# Altium PCB PCB1.PcbDoc
Units mil, origin at the board's own origin, x right, y up, seen from the top; angles counter-clockwise.
Board outline 10614.63 x 650 mil, 2 copper layers (Top Layer, Bottom Layer); 27 components, 29 nets, 217 pads, 19 vias.
Unrouted connection lines stored in the file: 21.
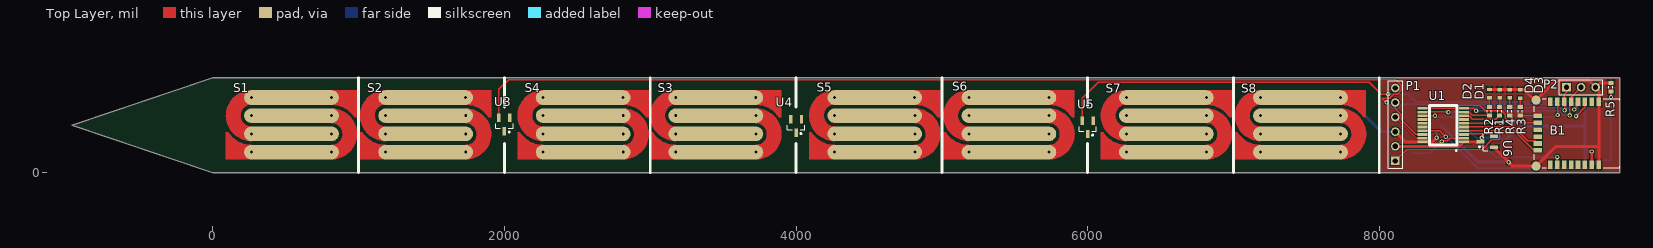
[diagram p0: Top Layer view]
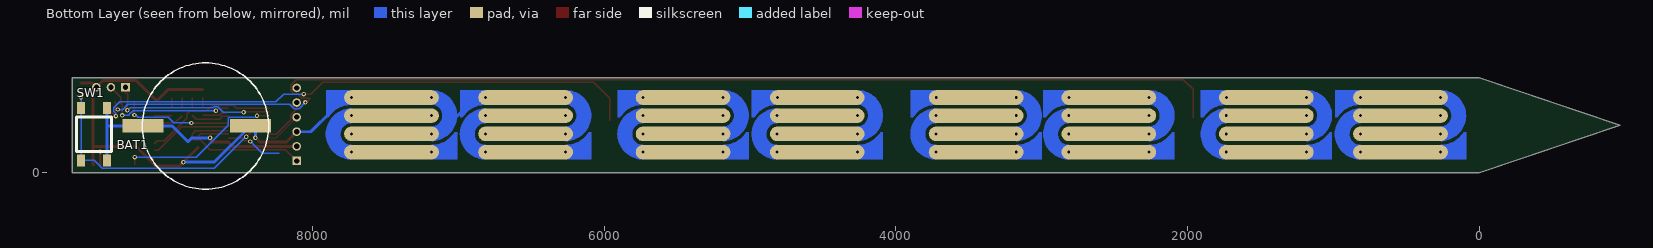
[diagram p1: Bottom Layer view, seen from below]

## Layer stack, top to bottom
Top Solder: solder mask 0.4, Solder Resist, Dk 3.5
Top Layer: signal copper 1.4
Dielectric 1: dielectric 12.6, FR-4, Dk 4.8
Bottom Layer: signal copper 1.4
Bottom Solder: solder mask 0.4, Solder Resist, Dk 3.5

## Board outline
9650,0 0,0 -964.62,325 0,650 9650,650

## Design rules (kind name [scope] priority, off if disabled: settings)
Clearance [All] p1: gap=7
HoleSize [All] p1: absolutevalues=TRUE maxlimit=100 minlimit=10 maxpercent=80.000 minpercent=20.000
MinimumSolderMaskSliver [All] p1: minsoldermaskwidth=7
PolygonConnect [All] p1: connectstyle=Relief reliefconductorwidth=10 reliefentries=4 polygonreliefangle="90 Angle" airgapwidth=10
RoomDefinition Sheet1 [InComponentClass('Sheet1')] p1 off: confinementstyle=ConfineIn formatcopy=TRUE lockcomponents=FALSE outline -7999.62,-4020 -5999.62,-4020 -5999.62,-3020 -7999.62,-3020
RoutingVias [All] p1: holewidth=10 width=25 viastyle="Through Hole" minholewidth=10 minwidth=25 maxholewidth=28 maxwidth=50
SilkToSilkClearance [All] p1 off: silktosilkclearance=10
SilkToSolderMaskClearance [IsPad] p1 off: minsilkscreentomaskgap=10 clearancetoexposedcopper=TRUE
SolderMaskExpansion [All] p1: expansion=4
Width Width_VCC [InNet('VCC')] p1: maxlimit=20 minlimit=8 preferedwidth=20
Width Width_GND [InNet('GND')] p2: maxlimit=20 minlimit=8 preferedwidth=20 minimp=50.000000 maximp=50.000000 favimp=50.000000
Width [All] p3: maxlimit=20 minlimit=8 preferedwidth=20 minimp=50.000000 maximp=50.000000 favimp=50.000000
26 further rules are at their usual default settings.

## Components (designator, comment, footprint, x,y, rotation, side; value= is the part's Value field where it differs from the comment)
B1 "RN4020" "RN4020 MODULE-24" 9290,270 r270 top
BAT1 "2032 Coin Cell" 1063TR-COINCELL 8770,320 r270 bottom
D1 "LED" 603_ 8825,540 r0 top
D2 "LED" 603_ 8756,541 r0 top
D3 "LED" 603_ 8966,539 r0 top
D4 "LED" 603_ 8895,540 r0 top
P1 "Header 6" HDR1X6 8110,80 r90 top
P2 "Serial" HDR1X3 9284,585 r0 top
R1 "Res3" J1-0603 8825,421 r90 top
R2 "Res3" J1-0603 8755,421 r90 top
R3 "Res3" J1-0603 8967,420 r90 top
R4 "Res3" J1-0603 8895,420 r90 top
R5 "Res3" J1-0603 9589,585 r270 top
S1 "MoistureSensor" MOISTURE_2 90,90 r0 top
S2 "MoistureSensor" MOISTURE_2 1010,90 r0 top
S3 "MoistureSensor" MOISTURE_2 3000.19,90 r0 top
S4 "MoistureSensor" MOISTURE_2 2090,90 r0 top
S5 "MoistureSensor" MOISTURE_2 4090,90 r0 top
S6 "MoistureSensor" MOISTURE_2 5010,90 r0 top
S7 "MoistureSensor" MOISTURE_2 6090,90 r0 top
S8 "MoistureSensor" MOISTURE_2 7010,90 r0 top
SW1 "PUSHBUTTON" PUSHBUTTON 9411,83 r0 bottom
U1 "PIC16LF1559" SSOP-20 8580,210 r180 top
U3 "MCP9700" SOT23_M 2000,330 r270 top
U4 "MCP9700" SOT23_M 4000,320 r270 top
U5 "MCP9700" SOT23_M 6000,310 r270 top
U6 "MCP9700" SOT23_M 8740,210 r180 top

## Footprints (in the part's own frame and the unit in brackets; to place one, negate y for a bottom-side part, rotate by r counter-clockwise, add the part's x,y. Pads: shape width x height; smd on the part's side, far side on the other; paste and mask are expansions set on the pad)
603_ [mm]
  rect 0.8x0.6 smd: 1(0,-0.725) 2(0,0.725)
1063TR-COINCELL [mm]
  rect 2.36x7.1 smd: 1(0,-10) 2(0,8.7)
  silkscreen extent -10.97,-10.12 11.02,11.87
HDR1X3 [mm] "Connector; Header; 3 Position"
  rect 1.5x1.5 hole 0.9: 1(0,0)
  round 1.5 hole 0.9: 2(2.54,0) 3(5.08,0)
  silkscreen extent -1.27,-1.27 6.35,1.27
HDR1X6 [mm] "Connector; Header; 6 Position"
  rect 1.5x1.5 hole 0.9: 1(0,0)
  round 1.5 hole 0.9: 2(2.54,0) 3(5.08,0) 4(7.62,0) 5(10.16,0) 6(12.7,0)
  silkscreen extent -1.27,-1.27 13.97,1.27
J1-0603 [mm] "Chip Resistor, Body 1.6x0.8mm, IPC High Density"
  rect 0.7x0.9 smd: 1(-0.75,0) 2(0.75,0)
  silkscreen extent -0.2,-0.35 0.2,0.35, body extent -0.85,-0.48 0.85,0.48, height 0.9
MOISTURE_2 [mil]
  round 30 hole 20: 0(175,175.13) 0(175.01,425.36) 0(723.64,424.77) 0(725,175) 1(175,300) 1(175,49.88) 1(725,49.64) 1(725,299.87)
  oval 650x100 smd paste-1000: 0(449.93,424.51) 0(450,175) 1(450,50) 1(450,300)
  oval 650x100 smd far side paste-1000: 0(449.93,424.51) 0(450,175) 1(450,50) 1(450,300)
  Top Layer region: 723.64,374.66 809.98,354.39 876.55,295.78 876.56,295.78 882.97,290.02 898.64,290.02 898.64,299.66 898.64,474.66 723.64,474.66
  Top Layer region: 175,125.25 87.95,149.33 24.08,213.2 0,300.25 0,300.25 24.08,387.3 87.95,451.17 175,475.25 175,475.25 175,375.25 146.05,369.98 121.49,353.76 105.27,329.21 100,300.25 100,300.25 110.54,263.1 137.85,235.79 175,225.25 175,225.25
  Top Layer region: 725,349.75 812.05,325.67 875.92,261.8 900,174.75 900,174.75 875.92,87.7 812.05,23.83 725,-0.25 725,-0.25 725,99.75 753.95,105.02 778.51,121.24 794.73,145.79 800,174.75 800,174.75 789.46,211.9 762.15,239.21 725,249.75 725,249.75
  Top Layer region: 175,100 91.86,118.66 26.27,173.04 26.27,173.04 15.67,184.64 0,184.64 0,175 0,0 175,0
  Bottom Layer region: 723.64,374.66 809.98,354.39 876.56,295.78 876.56,295.78 882.97,290.02 898.64,290.02 898.64,299.66 898.64,474.66 723.64,474.66
  Bottom Layer region: 175,125.25 87.95,149.33 24.08,213.2 0,300.25 0,300.25 24.08,387.3 87.95,451.17 175,475.25 175,475.25 175,375.25 146.05,369.98 121.49,353.76 105.27,329.21 100,300.25 100,300.25 110.54,263.1 137.85,235.79 175,225.25 175,225.25
  Bottom Layer region: 725,349.75 812.05,325.67 875.92,261.8 900,174.75 900,174.75 875.92,87.7 812.05,23.83 725,-0.25 725,-0.25 725,99.75 753.95,105.02 778.51,121.24 794.73,145.79 800,174.75 800,174.75 789.46,211.9 762.15,239.21 725,249.75 725,249.75
  Bottom Layer region: 175,100 91.86,118.66 26.27,173.04 26.27,173.04 15.67,184.64 0,184.64 0,175 0,0 175,0
PUSHBUTTON [mm] "TE 5-1437565-0"
  rect 1.4x2.1 smd: 1(4.5,-9.1) 1(4.5,0) 2(0,-9.1) 2(0,0)
  silkscreen extent -0.8,-7.57 5.3,-1.55
"RN4020 MODULE-24" [mm]
  rect 1.5x0.8 smd: 1(-5.5,5.45) 2(-5.5,4.25) 3(-5.5,3.05) 4(-5.5,1.85) 5(-5.5,0.65) 6(-5.5,-0.55) 7(-5.5,-1.75) 8(-5.5,-2.95) 17(5.5,-2.95) 18(5.5,-1.75) 19(5.5,-0.55) 20(5.5,0.65) 21(5.5,1.85) 22(5.5,3.05) 23(5.5,4.25) 24(5.5,5.45)
  round 1.6 smd: 9(-5.75,-5.45) 16(5.75,-5.45)
  rect 0.8x1.5 smd: 10(-3,-5.15) 11(-1.8,-5.15) 12(-0.6,-5.15) 13(0.6,-5.15) 14(1.8,-5.15) 15(3,-5.15)
  silkscreen extent -6,-5.75 6,9.1, body extent -5.75,-5.45 5.75,14.05, height 2.3
SOT23_M [mm] "SOT23, 3-Leads, Body 2.9x1.3mm, Pitch 0.95mm, Lead Span 2.3mm - Reverse Pinning, IPC Low Density"
  rect 1.45x0.6 smd: 1(1.175,0) 2(-1.175,-0.95) 3(-1.175,0.95)
  silkscreen extent -0.1,-1.5 1.47,1.5, body extent -0.7,-1.5 0.7,1.5, height 1.1
SSOP-20 [mm]
  rect 1.75x0.45 smd: 1(0,0) 2(0,-0.65) 3(0,-1.3) 4(0,-1.95) 5(0,-2.6) 6(0,-3.25) 7(0,-3.9) 8(0,-4.55) 9(0,-5.2) 10(0,-5.85) 11(7.2,-5.85) 12(7.2,-5.2) 13(7.2,-4.55) 14(7.2,-3.9) 15(7.2,-3.25) 16(7.2,-2.6) 17(7.2,-1.95) 18(7.2,-1.3) 19(7.2,-0.65) 20(7.2,0)
  silkscreen extent 1.2,-6.35 5.98,1.63

## Part data
P1: "Header, 6-Pin"
P2: library part "Header 3", "Header, 3-Pin"
R1 R2 R3 R4 R5: "Resistor"
SW1: "TE 5-1437565-0"

## Via types
v1: diameter 30, hole 15, Top Layer to Bottom Layer, 19 vias

## Nets (pads, with @x,y where several pads share a name; then routed paths per layer and width w, separated by ;. In a path a pad name is that pad's centre, name@x,y a point inside that pad or via, vN(x,y) a via of type N, cw(c..) or ccw(c..) an arc to the next point about the centre after c; other vN are vias at no path point)
CONNECT: B1.10 R3.1 | length 121.2
  Top Layer w10: R3.1 8969.36,388.11 B1.10
CTS: B1.14 U1.11 | length 924.3
  Top Layer w10: U1.11 8519.72,440.31 8540.58,461.17 8688.83,461.17 8725.25,424.75 8840.19,424.75 8865.28,399.66 8865.28,371.72 9018.37,218.63 9067.75,218.63 B1.14
GND: B1.1 B1.9 B1.16 B1.24 BAT1.2 D1.2 D2.2 D3.2 D4.2 P1.3 P2.3 R5.1 S1.0 S2.0 S3.0 S4.0 S5.0 S6.0 S7.0 S8.0 U1.20 U3.3 U4.3 U5.3 U6.3 | length 3655.1
  Top Layer w20: P1.3 8180,210 ; 8180,209 8296.54,209 8364,209 ; 8364,210 v1(8393,239) ; D2.2 8990.46,569.54 9063.62,496.38 B1.9 9210.58,631.53 9437.47,631.53 P2.3 ; U6.3 v1@8887.43,71.43 ; v1(8887,71) v1@8887.43,71.43 ; B1.24 9506,54.9 9506,180 ; R5.1 9513.53,614.53 P2.3 ; v1@8887.43,71.43 8915.23,43.62 B1.16 9211.81,180 9506,180 ; P2.3 9506,563 9506,180
  Bottom Layer w20: 6972,424 7020,376 7028,368 7052,368 ; 7872,421 8013,280 P1.3 ; v1(8393,239) BAT1.2@8393,285.52 ; BAT1.2 8676.48,71 v1(8887,71)
LED1: R1.1 U1.8 | length 268.2
  Top Layer w10: U1.8 8580,384.4 8619.42,384.4 8638.13,365.69 8799.22,365.69 R1.1
LED2: R2.1 U1.9 | length 184.6
  Top Layer w10: U1.9 8584.73,409.99 8619.42,409.99 8637.94,391.47 R2.1
M1: S1.1 S2.1 U1.16
M2: S3.1 S4.1 U1.15
M3: S5.1 S6.1 U1.14
M4: S7.1 S8.1 U1.7
MLDP: B1.8
MLDP_EV: B1.11 R4.1 | length 212.8
  Top Layer w10: R4.1 8944.61,340.87 B1.11
NetD1_1: D1.1 R1.2 | length 60.9
  Top Layer w10: R1.2 D1.1
NetD2_1: D2.1 R2.2 | length 60.9
  Top Layer w10: R2.2 D2.1@8755,511.46
NetD3_1: D3.1 R3.2 | length 59.9
  Top Layer w10: R3.2 D3.1@8967,509.46
NetD4_1: D4.1 R4.2 | length 61.9
  Top Layer w10: R4.2 D4.1
NetP1_1: P1.1 U1.4 | length 1068.9
  Top Layer w10: P1.1 8188,158 8706.1,158 8771.69,223.59 8819.77,223.59 8826.8,230.62 8826.8,264.18 8804.21,286.77 U1.4
NetP1_4: P1.4 U1.19 | length 246.4
  Top Layer w8: P1.4 8254.41,235.59 U1.19
NetP1_5: P1.5 U1.18 | length 322.5
  Top Layer w10: P1.5 8110,438.73 8151.53,397.2 8151.53,361.1 8251.45,261.18 U1.18
NetR5_2: R5.2 SW1.1 U1.17 | length 1868.4
  Top Layer w10: U1.17 8414.23,286.77 v1(8456,245) ; v1(9589,516) R5.2
  Bottom Layer w10: v1(8456,245) 8460,245 8675.34,29.66 9443.53,29.66 9496.87,83 9588.17,83 SW1.1@9588.17,417.84 ; SW1.1@9589,442.1 v1(9589,516)
RTS: B1.18 U1.13 | length 1121.8
  Top Layer w10: U1.13 v1(8381.87,389.13) ; B1.18 v1(9221.1,105.9)
  Bottom Layer w10: v1(8381.87,389.13) 8392.54,378.46 8572.22,378.46 8579.25,371.43 8579.25,324.57 8797.92,105.9 v1(9221.1,105.9)
RX: B1.6 P2.1 U1.12 | length 1168.4
  Top Layer w10: U1.12 8296.54,416.13 8393.05,416.13 8393.18,416 8471,416 v1(8474,413) ; v1(9271,427) 9271,483.88 B1.6 9268.35,535.35 9284,551 P2.1
  Bottom Layer w10: v1(8474,413) 8614.82,413 8652.82,451 8675.18,451 8681.18,445 9253,445 v1(9271,427)
TEMP1: B1.4 U3.2 | length 8061.6
  Top Layer w10: U3.2 1962.6,569.6 2030,637 8111.73,637 8151.53,597.2 8151.53,562.8 8127.2,538.47 8100.66,538.47 8073.18,511 8015.96,511 8045.96,481 v1(8050.27,481) ; v1(9337,432) 9352,447 9352,475.7 B1.4
  Bottom Layer w10: v1(8050.27,481) 8092.8,438.47 8127.2,438.47 8156.73,468 9268.18,468 9304.18,432 v1(9337,432)
TEMP2: U1.2 U4.2 | length 391.9
  Top Layer w10: v1(8428,213) 8433,218 8467.18,218 8484.77,235.59 U1.2
  Bottom Layer w10: 8231,132 8347,132 v1(8428,213)
TEMP3: B1.3 U5.2 | length 3860.1
  Top Layer w10: U5.2 5962.6,509.6 6073,620 7931,620 8013,538 v1(8062,538) ; v1(9350,387) 9410.08,447.08 B1.3
  Bottom Layer w10: v1(8062,538) 8200,538 8253,485 9322.18,485 9364,443.18 9364,420.82 9350,406.82 v1(9350,387)
TEMP4: U1.3 U6.2 | length 215.1
  Top Layer w10: U1.3 8583.82,265 8768.66,265 U6.2
TX: B1.5 P2.2 U1.10 | length 977
  Top Layer w10: U1.10 8647.69,440.31 v1(8664,424) ; v1(9306,392) 9306,464.94 9320,478.94 9314,484.94 B1.5 9315.59,516.59 P2.2
  Bottom Layer w10: v1(8664,424) 9232.18,424 9250,406.18 9250,405 9263,392 v1(9306,392)
VCC: B1.23 BAT1.1 P1.2 SW1.2 U1.1 U3.1 U4.1 U5.1 U6.1 | length 1876.9
  Top Layer w20: P1.2 8551.27,180 8580,208.73 8635.73,208.73 ; 8644,210 U6.1 8704,220.26 v1(8704,238) ; B1.23@9456,54.79 9459,57.79 9457,59.79 v1(9457,144)
  Bottom Layer w20: v1(8704,238) 8828,238 8855,211 8964,320 BAT1.1 9409,320 9410,319 ; SW1.2@9411,83 9411,145 ; SW1.2@9411,441.27 9411,145 ; v1@9456,145 9411,145
WAKE_HW: B1.15 U1.5 | length 573.7
  Top Layer w10: U1.5 8899.64,312.36 9060.11,151.89 B1.15
WAKE_SW: B1.7 U1.6 | length 759.9
  Top Layer w10: U1.6 8829.95,337.95 v1(8832,340) ; B1.7 9220,485.43 9223,482.43 v1(9223,395)
  Bottom Layer w10: v1(8832,340) 8952.89,340 8991.34,378.46 9198.46,378.46 9215,395 v1(9223,395)
pads on no net: B1.2 B1.12 B1.13 B1.17 B1.19 B1.20 B1.21 B1.22 P1.6

## Polygon pours and split planes (outlines as drawn)
GND on Top Layer "Multi-Layer-No Net" (solid, pour order 4): 8010,650 8010,0 9645,0 9645,650

## Silkscreen, mask and mechanical layers (free items; w line width, h text height)
Top Overlay:
  lines w20: 1000,0 1000,650 ; 2000,0 2000,200 ; 2000,450 2000,650 ; 3000.19,0 3000.19,650 ; 4000,0 4000,200 ; 4000,450 4000,650 ; 5000,0 5000,650 ; 6000,0 6000,200 ; 6000,450 6000,650 ; 7000,0 7000,650 ; 8000,0 8000,650